# EAGLE board LM13700 VCA (EAGLE 7.4.0)
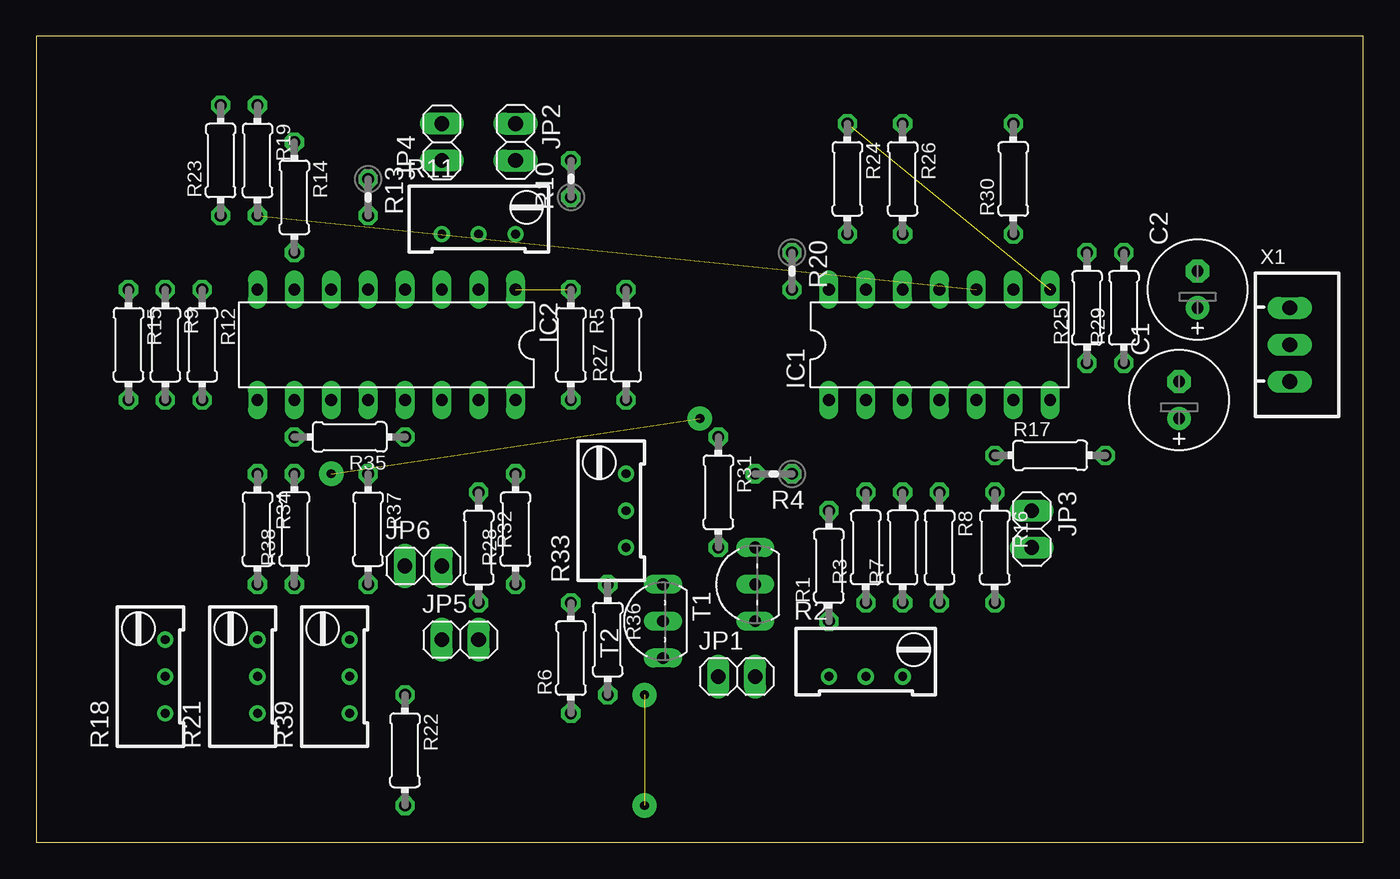
[diagram p0: board, top side]
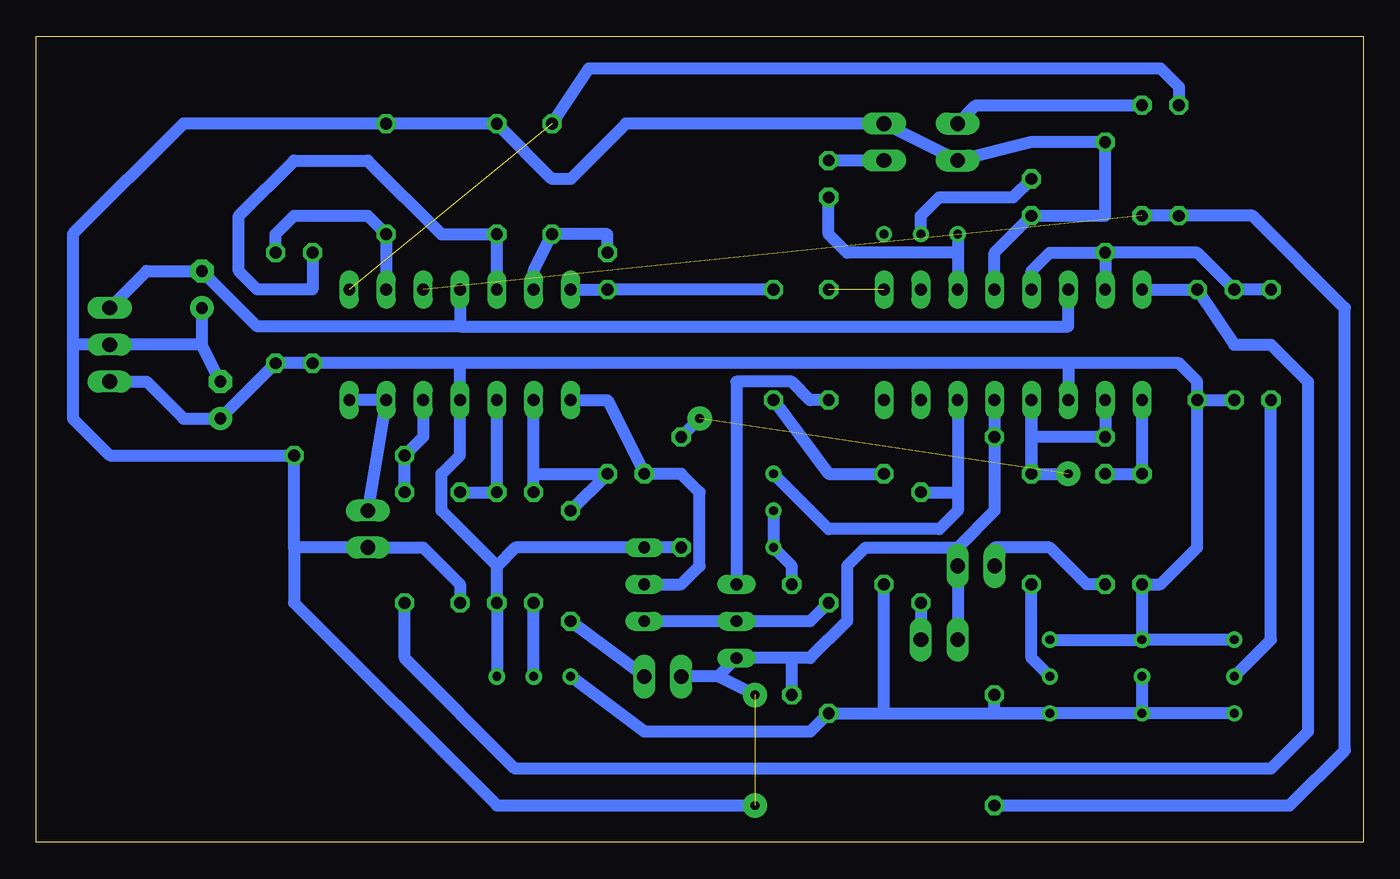
[diagram p1: board, bottom side, seen from below]

Size 91.42 x 55.55 mm. Coordinates in mm from the lower left corner, seen from the top.
Outline: 0,0 91.42,0 91.42,55.55 0,55.55 0,0
Copper layers (1*16): Top 0.035mm / dielectric 1.5mm / Bottom 0.035mm
Design rules "default": minimum track width 10mil, minimum drill 24mil, track to track 8mil, track to pad 8mil, pad to pad 8mil, via to via 8mil, smd to smd 8mil, copper to edge 40mil, drill to drill 8mil, minimum pad ring 10mil, minimum via ring 8mil, stop-mask expansion 4mil, vias tented up to drill 0mil, thermal gap 10mil

## Footprints (pad centres in the part's own frame; a part is rotated, then mirrored left to right if it is on the bottom)
E2,5-7 = drill 0.813 pad 1.6: + -1.27,0 | drill 0.813 pad 1.6 octagon: - 1.27,0
DIL14 = drill 0.813 long: 1 -7.62,-3.81; 2 -5.08,-3.81; 3 -2.54,-3.81; 4 0,-3.81; 5 2.54,-3.81; 6 5.08,-3.81; 7 7.62,-3.81; 8 7.62,3.81; 9 5.08,3.81; 10 2.54,3.81; 11 0,3.81; 12 -2.54,3.81; 13 -5.08,3.81; 14 -7.62,3.81
DIL16 = drill 0.813 long: 1 -8.89,-3.81; 2 -6.35,-3.81; 3 -3.81,-3.81; 4 -1.27,-3.81; 5 1.27,-3.81; 6 3.81,-3.81; 7 6.35,-3.81; 8 8.89,-3.81; 9 8.89,3.81; 10 6.35,3.81; 11 3.81,3.81; 12 1.27,3.81; 13 -1.27,3.81; 14 -3.81,3.81; 15 -6.35,3.81; 16 -8.89,3.81
1X02 = drill 1.016 long: 1 -1.27,0; 2 1.27,0
0204/7 = drill 0.813 octagon: 1 -3.81,0; 2 3.81,0
RTRIM64W = drill 0.61: 1 1.27,-2.54; 2 1.27,0; 3 1.27,2.54
0204V = drill 0.813 octagon: 1 -1.27,0; 2 1.27,0
TO92-EBC = drill 0.813 long: B 0,-1.27; C 2.54,-1.27; E -2.54,-1.27
JST-XH-03-PACKAGE-LONG-PAD = drill 1.016 long: 1 -2.54,0; 2 0,0; 3 2.54,0

## Placement (x,y rotation side)
C1  [E2,5-7]  78.74,30.48 90 top
C2  [E2,5-7]  80.01,38.1 90 top
IC1  TL084P  [DIL14]  62.23,34.29 0 top
IC2  LM13700N  [DIL16]  24.13,34.29 180 top
JP1  CV1(EXP)  [1X02]  48.26,11.43 0 top
JP2  AUDIO IN1  [1X02]  33.02,48.26 270 top
JP3  O1  [1X02]  68.58,21.59 270 top
JP4  CV2(LIN)  [1X02]  27.94,48.26 90 top
JP5  IN2  [1X02]  29.21,13.97 0 top
JP6  O2  [1X02]  26.67,19.05 0 top
R1  100K  [0204/7]  54.61,19.05 90 top
R2  CV1 OFST  [RTRIM64W]  57.15,12.7 270 top
R3  100K  [0204/7]  57.15,20.32 90 top
R4  2K  [0204V]  50.8,25.4 180 top
R5  20K  [0204/7]  36.83,34.29 270 top
R6  120K  [0204/7]  36.83,12.7 90 top
R7  100K  [0204/7]  59.69,20.32 90 top
R8  2K  [0204/7]  62.23,20.32 270 top
R9  [0204/7]  8.89,34.29 270 top
R10  [0204V]  36.83,45.72 90 top
R11  IN1 atten  [RTRIM64W]  30.48,43.18 270 top
R12  [0204/7]  11.43,34.29 270 top
R13  [0204V]  22.86,44.45 270 top
R14  [0204/7]  17.78,44.45 270 top
R15  [0204/7]  6.35,34.29 270 top
R16  [0204/7]  66.04,20.32 270 top
R17  [0204/7]  69.85,26.67 0 top
R18  O1 BIAS  [RTRIM64W]  7.62,11.43 0 top
R19  100K  [0204/7]  15.24,46.99 270 top
R20  100K  [0204V]  52.07,39.37 270 top
R21  CV2 OFST  [RTRIM64W]  13.97,11.43 0 top
R22  100K  [0204/7]  25.4,6.35 270 top
R23  2K  [0204/7]  12.7,46.99 90 top
R24  2K  [0204/7]  55.88,45.72 270 top
R25  100K  [0204/7]  72.39,36.83 90 top
R26  470R  [0204/7]  59.69,45.72 270 top
R27  30K  [0204/7]  40.64,34.29 90 top
R28  20K  [0204/7]  33.02,21.59 90 top
R29  100K  [0204/7]  74.93,36.83 90 top
R30  2K  [0204/7]  67.31,45.72 90 top
R31  [0204/7]  46.99,24.13 270 top
R32  [0204/7]  30.48,20.32 270 top
R33  I2 atten  [RTRIM64W]  39.37,22.86 0 top
R34  [0204/7]  15.24,21.59 270 top
R35  [0204/7]  21.59,27.94 180 top
R36  [0204/7]  39.37,13.97 270 top
R37  [0204/7]  22.86,21.59 270 top
R38  [0204/7]  17.78,21.59 90 top
R39  O2 BIAS  [RTRIM64W]  20.32,11.43 0 top
T1  [TO92-EBC]  48.26,17.78 90 top
T2  [TO92-EBC]  41.91,15.24 90 top
X1  JST3P  [JST-XH-03-PACKAGE-LONG-PAD]  86.36,34.29 270 top

## Library data of the parts
C1 C2 R1 R3-R10 R12-R17 R19 R20 R22-R32 R34-R38 = rcl
IC1 = linear
IC2 = ota
JP1-JP6 = pinhead
R2 R11 R18 R21 R33 R39 = resistor
T1 T2 = transistor-neu-to92
X1 = Rembrandt Electronics - JST XH Connectors v1-0

## Nets
GND: C1.- C2.+ IC2.4 IC2.13 JP1.1 JP2.1 JP3.2 JP4.1 JP5.1 JP6.2 R8.2 R13.2 R14.1 R17.2 R26.1 R30.2 R35.1 R36.2 T2.E X1.2
N$1: IC1.3 R7.2 R8.1
N$2: IC1.2 R1.2 R3.2 R4.1
N$3: IC1.1 R4.2 T1.B
N$4: R6.2 T1.E T2.B
N$5: R5.2 T2.C
N$6: JP1.2 R1.1
N$7: R2.2 R3.1
N$8: IC2.16
N$9: IC2.3 R10.1 R11.1
N$11: IC2.14 R32.1 R33.3
N$12: IC2.5 IC2.7 R9.1 R14.2 R15.1
N$13: R15.2 R18.2
N$14: IC2.8 R12.1 R16.2
N$15: R33.1 R33.2 R36.1
N$16: IC1.5 R16.1 R17.1
N$17: IC1.6 IC1.7 JP3.1
N$18: JP2.2 R10.2
N$19: JP5.2 R32.2
N$20: IC1.9 R29.2 R30.1
N$21: IC1.10 R19.2 R22.2 R23.1
N$22: IC1.8 R23.2 R24.1
N$23: JP4.2 R19.1
N$24: R21.2 R22.1
N$25: IC1.13 R20.1 R24.2
N$26: IC1.14 R20.2 R27.2
N$27: IC1.12 R25.2 R26.2
N$28: R27.1 R28.2
N$29: IC2.10 IC2.12 R31.1 R35.2 R37.1
N$30: R37.2 R39.2
N$31: IC2.9 R34.1 R38.2
N$32: JP6.1 R38.1
N$37: R11.2 R13.1
RAW-EXP-CONTROL: IC2.1 R5.1
V-: C2.- IC1.11 IC2.6 X1.1
VCC: C1.+ IC1.4 IC2.11 R2.3 R7.1 R9.2 R12.2 R18.3 R21.3 R25.1 R29.1 R31.2 R34.2 R39.3 T1.C X1.3
VSS: R2.1 R6.1 R18.1 R21.1 R28.1 R39.1

## Tracks (layer width: path | path; a pad name or v marks a point on that pad's centre or on a via)
GND  (via drill 0.6 pad 1.68)  (1 unrouted)
  Bottom 0.813: C2.+ 80.01,34.29 | 80.01,34.29 X1.2 88.9,34.29 | R8.2 62.23,17.78 64.77,20.32 JP3.2 73.66,20.32 | 27.94,20.32 JP6.2 JP5.1 | 39.37,12.7 38.1,12.7 35.56,15.24 35.56,19.05 34.29,20.32 27.94,20.32 | 39.37,12.7 T2.E 44.45,11.43 | 73.66,20.32 R17.2 86.36,26.67 88.9,29.21 88.9,34.29 | C1.- 80.01,34.29 | v41.91,2.54 59.69,2.54 73.66,16.51 73.66,20.32 | 44.45,11.43 JP1.1 | R36.2 39.37,12.7 | 88.9,34.29 88.9,41.91 81.28,49.53 R30.2 R26.1 55.88,45.72 54.61,45.72 50.8,49.53 JP2.1 JP4.1 22.86,48.26 R14.1 17.78,43.18 R13.2 25.4,40.64 IC2.4 | IC2.13 R35.1 25.4,22.86 27.94,20.32 | v41.91,10.16 44.45,11.43
N$1
  Bottom 0.813: R8.1 R7.2 IC1.3
N$2
  Bottom 0.813: IC1.2 R3.2 57.15,25.4 R4.1 R1.2
N$3
  Bottom 0.813: T1.B 46.99,17.78 45.72,19.05 45.72,24.13 46.99,25.4 R4.2 52.07,30.48 IC1.1
N$4
  Bottom 0.813: R6.2 38.1,15.24 T2.B T1.E
N$5
  Bottom 0.813: R5.2 38.1,30.48 39.37,31.75 43.18,31.75 T2.C
N$6
  Bottom 0.813: JP1.2 R1.1
N$7
  Bottom 0.813: R2.2 R3.1
N$9
  Bottom 0.813: 27.94,40.64 IC2.3 | R11.1 27.94,40.64 | 27.94,40.64 35.56,40.64 36.83,41.91 R10.1
N$11
  Bottom 0.813: IC2.14 27.94,24.13 | 27.94,24.13 27.94,22.86 29.21,21.59 36.83,21.59 R33.3 | R32.1 27.94,24.13
N$12
  Bottom 0.813: IC2.5 22.86,39.37 21.59,40.64 R14.2 | R14.2 IC2.7 | R14.2 11.43,40.64 R9.1 R15.1
N$13
  Bottom 0.813: R18.2 6.35,13.97 R15.2
N$14
  Bottom 0.813: IC2.8 R12.1 8.89,34.29 6.35,34.29 3.81,31.75 3.81,7.62 6.35,5.08 58.42,5.08 66.04,12.7 R16.2
N$15
  Bottom 0.813: R33.2 R33.1 39.37,19.05 R36.1
N$16
  Bottom 0.813: IC1.5 64.77,27.94 R17.1 R16.1
N$17
  Bottom 0.813: IC1.7 IC1.6 JP3.1
N$18
  Bottom 0.813: JP2.2 R10.2
N$19
  Bottom 0.813: R32.2 JP5.2
N$20
  Bottom 0.813: IC1.9 R30.1 68.58,43.18 73.66,43.18 74.93,41.91 R29.2
N$21  (1 unrouted)
  Bottom 0.813: R19.2 R23.1 7.62,43.18 1.27,36.83 1.27,6.35 5.08,2.54 R22.2
N$22  (1 unrouted)
  Bottom 0.813: R24.1 53.34,53.34 13.97,53.34 12.7,52.07 R23.2
N$23
  Bottom 0.813: JP4.2 26.67,50.8 R19.1
N$24
  Bottom 0.813: R21.2 15.24,8.89 25.4,8.89 R22.1
N$25
  Bottom 0.813: IC1.13 57.15,39.37 R24.2 52.07,41.91 R20.1
N$26
  Bottom 0.813: IC1.14 R20.2 R27.2
N$27
  Bottom 0.813: IC1.12 R26.2 63.5,41.91 68.58,46.99 73.66,46.99 77.47,43.18 77.47,39.37 76.2,38.1 72.39,38.1 R25.2
N$28
  Bottom 0.813: R27.1 36.83,25.4 R28.2
N$29  (1 unrouted)
  Bottom 0.813: IC2.10 R35.2 22.86,27.94 | 22.86,27.94 IC2.12 R37.1 | R37.1 22.86,27.94 | R31.1 45.72,29.21 | R37.1 20.32,25.4
N$30
  Bottom 0.813: R39.2 22.86,12.7 R37.2
N$31
  Bottom 0.813: IC2.9 R34.1 R38.2
N$32
  Bottom 0.813: R38.1 19.05,17.78 21.59,20.32 25.4,20.32 JP6.1
N$35  (via drill 0.6 pad 1.68)
  other vias: 20.32,25.4
N$36  (via drill 0.6 pad 1.68)
  other vias: 45.72,29.21
N$37
  Bottom 0.813: R11.2 30.48,43.18 29.21,44.45 24.13,44.45 R13.1
RAW-EXP-CONTROL  (1 unrouted)
V-
  Bottom 0.813: X1.1 83.82,39.37 C2.- 76.2,35.56 62.23,35.56 | 62.23,35.56 20.32,35.56 IC2.6 | IC1.11 62.23,35.56
VCC
  Bottom 0.813: 62.23,33.02 IC1.4 62.23,26.67 63.5,25.4 63.5,22.86 59.69,19.05 | 62.23,33.02 R25.1 R29.1 C1.+ 81.28,29.21 83.82,31.75 X1.3 | R12.2 11.43,31.75 12.7,33.02 20.32,33.02 | 20.32,33.02 IC2.11 | R12.2 R9.2 | 59.69,19.05 R7.1 R2.3 | 59.69,19.05 58.42,20.32 T1.C R31.2 | 20.32,33.02 62.23,33.02 | R18.3 R21.3 | R21.3 R34.2 13.97,17.78 11.43,20.32 R12.2 | R39.3 R21.3
VSS
  Bottom 0.813: 33.02,8.89 R28.1 | R18.1 R21.1 R39.1 33.02,8.89 | 33.02,8.89 R6.1 38.1,7.62 49.53,7.62 R2.1